# EAGLE board ssd_blinky_eagle_panel (EAGLE 6.5.0)
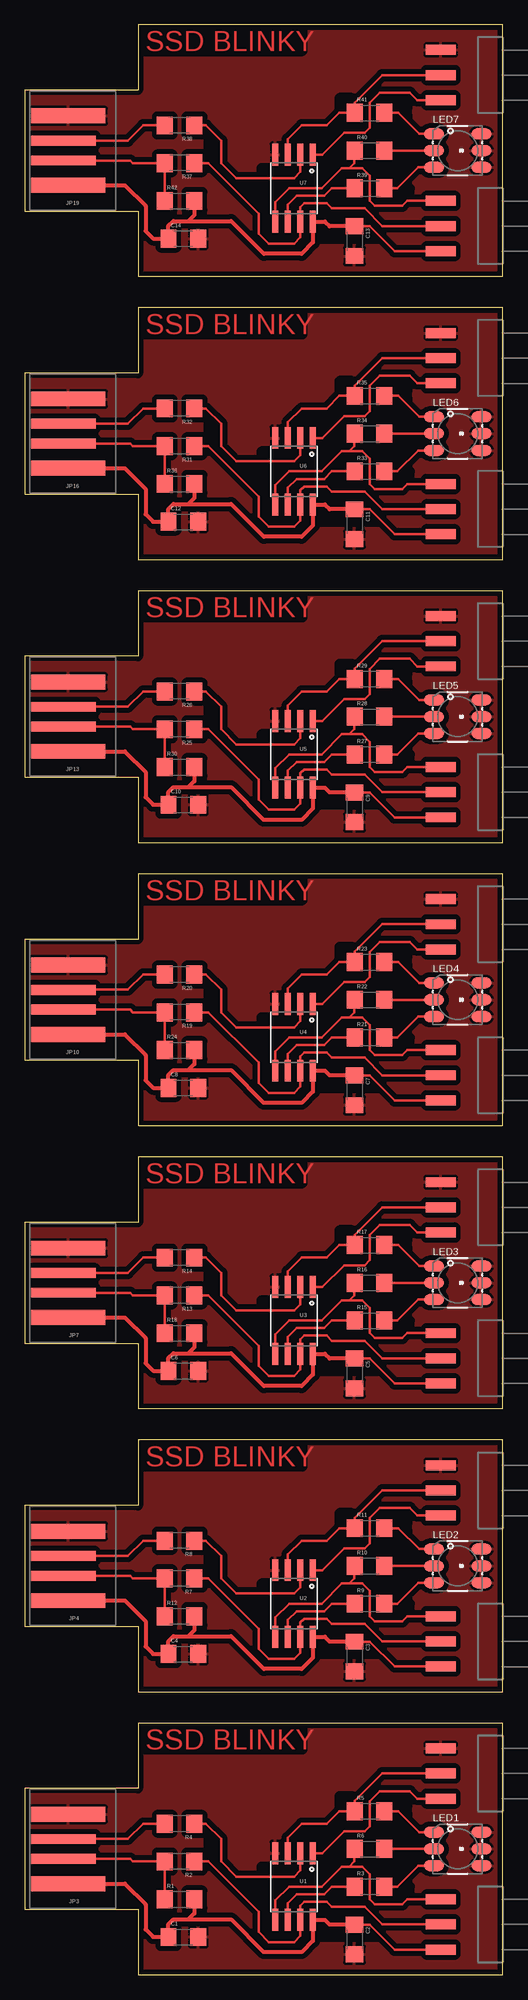
[diagram p0: board, top side]

Size 48.26 x 196.85 mm. Coordinates in mm from the lower left corner, seen from the top.
Outline: 11.43,0 48.26,0 48.26,25.4 11.43,25.4 11.43,18.8 0,18.8 0,6.6 11.43,6.6 11.43,0
Outline: 11.43,28.57 48.26,28.57 48.26,53.98 11.43,53.98 11.43,47.37 0,47.37 0,35.18 11.43,35.18 11.43,28.57
Outline: 11.43,57.15 48.26,57.15 48.26,82.55 11.43,82.55 11.43,75.95 0,75.95 0,63.75 11.43,63.75 11.43,57.15
Outline: 11.43,85.72 48.26,85.72 48.26,111.12 11.43,111.12 11.43,104.52 0,104.52 0,92.33 11.43,92.33 11.43,85.72
Outline: 11.43,114.3 48.26,114.3 48.26,139.7 11.43,139.7 11.43,133.1 0,133.1 0,120.9 11.43,120.9 11.43,114.3
Outline: 11.43,142.88 48.26,142.88 48.26,168.28 11.43,168.28 11.43,161.67 0,161.67 0,149.48 11.43,149.48 11.43,142.88
Outline: 11.43,171.45 48.26,171.45 48.26,196.85 11.43,196.85 11.43,190.25 0,190.25 0,178.05 11.43,178.05 11.43,171.45
Copper layers (1+16): Top 0.0178mm / dielectric 12mil / Bottom 0.0178mm
Design rules "GoldPhoenix-BES-2Lyr *": minimum track width 6mil, minimum drill 8mil, track to track 12mil, track to pad 12mil, pad to pad 12mil, via to via 12mil, smd to smd 12mil, copper to edge 20mil, drill to drill 16mil, minimum pad ring 8mil, minimum via ring 8mil, stop-mask expansion 3mil, vias tented up to drill 0mil, thermal gap 10mil
tRestrict: area 38.1,8.1 to 38.9,8.9; area 23.9,10.4 to 25.4,10.9; area 37.8,17 to 38.6,17.8; area 30,4.1 to 31.8,4.6; area 24.1,7.6 to 24.6,9.4; area 31.8,16.8 to 32,18; area 32,17.8 to 33,18; area 30,3.8 to 35.6,4.1; area 38.4,16.3 to 38.6,17; area 18.5,11.9 to 19,13.7; area 38.1,36.7 to 38.9,37.5; area 23.9,39 to 25.4,39.5; area 37.8,45.6 to 38.6,46.4; area 30,32.6 to 31.8,33.1; area 24.1,36.2 to 24.6,38; area 31.8,45.3 to 32,46.6; area 32,46.4 to 33,46.6; area 30,32.4 to 35.6,32.6; area 38.4,44.8 to 38.6,45.6; area 18.5,40.5 to 19,42.3; area 38.1,65.3 to 38.9,66; area 23.9,67.6 to 25.4,68.1; area 37.8,74.2 to 38.6,74.9; area 30,61.2 to 31.8,61.7; area 24.1,64.8 to 24.6,66.5; area 31.8,73.9 to 32,75.2; area 32,74.9 to 33,75.2; area 30,61 to 35.6,61.2; area 38.4,73.4 to 38.6,74.2; area 18.5,69.1 to 19,70.9; area 38.1,93.9 to 38.9,94.6; area 23.9,96.1 to 25.4,96.6; area 37.8,102.7 to 38.6,103.5; area 30,89.8 to 31.8,90.3; area 24.1,93.3 to 24.6,95.1; area 31.8,102.5 to 32,103.8; area 32,103.5 to 33,103.8; area 30,89.5 to 35.6,89.8; area 38.4,102 to 38.6,102.7; area 18.5,97.7 to 19,99.4; area 38.1,122.4 to 38.9,123.2; area 23.9,124.7 to 25.4,125.2; area 37.8,131.3 to 38.6,132.1; area 30,118.4 to 31.8,118.9; area 24.1,121.9 to 24.6,123.7; area 31.8,131.1 to 32,132.3; area 32,132.1 to 33,132.3; area 30,118.1 to 35.6,118.4; area 38.4,130.6 to 38.6,131.3; area 18.5,126.2 to 19,128; area 38.1,151 to 38.9,151.8; area 23.9,153.3 to 25.4,153.8; area 37.8,159.9 to 38.6,160.7; area 30,146.9 to 31.8,147.4; area 24.1,150.5 to 24.6,152.3; area 31.8,159.6 to 32,160.9; area 32,160.7 to 33,160.9; area 30,146.7 to 35.6,146.9; area 38.4,159.1 to 38.6,159.9; area 18.5,154.8 to 19,156.6; area 38.1,179.6 to 38.9,180.3; area 23.9,181.9 to 25.4,182.4; area 37.8,188.5 to 38.6,189.2; area 30,175.5 to 31.8,176; area 24.1,179.1 to 24.6,180.8; area 31.8,188.2 to 32,189.5; area 32,189.2 to 33,189.5; area 30,175.3 to 35.6,175.5; area 38.4,187.7 to 38.6,188.5; area 18.5,183.4 to 19.1,185.2

## Footprints (pad centres in the part's own frame; a part is rotated, then mirrored left to right if it is on the bottom)
1206 = smd 1.6 x 1.8: 1 -1.5,0; 2 1.5,0
1X03_SMD_RA_MALE = smd 1 x 3: 1 -2.54,5; 2 0,5; 3 2.54,5
USB-A-PCB = smd 7.5 x 1.5: 5V -0.2,3.5; GND -0.2,-3.5 | smd 6.5 x 1: USB_M 0.3,-1; USB_P 0.3,1
LED-TRICOLOR-5050 = smd 2 x 1.1: 1 -2.4,1.7; 2 -2.4,0; 3 -2.4,-1.7; 4 2.4,-1.7; 5 2.4,0; 6 2.4,1.7
SO08-EIAJ = smd 0.61 x 2.21: 1 -1.905,-3.378; 2 -0.635,-3.378; 3 0.635,-3.378; 4 1.905,-3.378; 5 1.905,3.353; 6 0.635,3.353; 7 -0.635,3.353; 8 -1.905,3.353

## Placement (x,y rotation side)
C1  [1206]  16,3.81 0 top
C2  [1206]  33.27,3.56 270 top
C3  [1206]  33.27,32.13 270 top
C4  [1206]  16,32.38 0 top
C5  [1206]  33.27,60.71 270 top
C6  [1206]  16,60.96 0 top
C7  [1206]  33.27,89.28 270 top
C8  [1206]  16,89.53 0 top
C9  [1206]  33.27,117.86 270 top
C10  [1206]  16,118.11 0 top
C11  [1206]  33.27,146.43 270 top
C12  [1206]  16,146.69 0 top
C13  [1206]  33.27,175.01 270 top
C14  [1206]  16,175.26 0 top
JP1  [1X03_SMD_RA_MALE]  46.99,5.08 90 top
JP2  [1X03_SMD_RA_MALE]  46.99,20.32 90 top
JP3  USBPCB  [USB-A-PCB]  4.19,12.7 180 top
JP4  USBPCB  [USB-A-PCB]  4.19,41.27 180 top
JP5  [1X03_SMD_RA_MALE]  46.99,33.66 90 top
JP6  [1X03_SMD_RA_MALE]  46.99,48.9 90 top
JP7  USBPCB  [USB-A-PCB]  4.19,69.85 180 top
JP8  [1X03_SMD_RA_MALE]  46.99,62.23 90 top
JP9  [1X03_SMD_RA_MALE]  46.99,77.47 90 top
JP10  USBPCB  [USB-A-PCB]  4.19,98.42 180 top
JP11  [1X03_SMD_RA_MALE]  46.99,90.81 90 top
JP12  [1X03_SMD_RA_MALE]  46.99,106.05 90 top
JP13  USBPCB  [USB-A-PCB]  4.19,127 180 top
JP14  [1X03_SMD_RA_MALE]  46.99,119.38 90 top
JP15  [1X03_SMD_RA_MALE]  46.99,134.62 90 top
JP16  USBPCB  [USB-A-PCB]  4.19,155.57 180 top
JP17  [1X03_SMD_RA_MALE]  46.99,147.96 90 top
JP18  [1X03_SMD_RA_MALE]  46.99,163.19 90 top
JP19  USBPCB  [USB-A-PCB]  4.19,184.15 180 top
JP20  [1X03_SMD_RA_MALE]  46.99,176.53 90 top
JP21  [1X03_SMD_RA_MALE]  46.99,191.77 90 top
LED1  LED-TRICOLOR-5050NO_IC  [LED-TRICOLOR-5050]  43.69,12.7 0 top
LED2  LED-TRICOLOR-5050NO_IC  [LED-TRICOLOR-5050]  43.69,41.27 0 top
LED3  LED-TRICOLOR-5050NO_IC  [LED-TRICOLOR-5050]  43.69,69.85 0 top
LED4  LED-TRICOLOR-5050NO_IC  [LED-TRICOLOR-5050]  43.69,98.42 0 top
LED5  LED-TRICOLOR-5050NO_IC  [LED-TRICOLOR-5050]  43.69,127 0 top
LED6  LED-TRICOLOR-5050NO_IC  [LED-TRICOLOR-5050]  43.69,155.57 0 top
LED7  LED-TRICOLOR-5050NO_IC  [LED-TRICOLOR-5050]  43.69,184.15 0 top
R1  [1206]  15.62,7.62 0 top
R2  [1206]  15.62,11.43 180 top
R3  [1206]  34.8,8.89 0 top
R4  [1206]  15.62,15.24 180 top
R5  [1206]  34.8,16.51 0 top
R6  [1206]  34.8,12.7 0 top
R7  [1206]  15.62,40.01 180 top
R8  [1206]  15.62,43.81 180 top
R9  [1206]  34.8,37.47 0 top
R10  [1206]  34.8,41.27 0 top
R11  [1206]  34.8,45.09 0 top
R12  [1206]  15.62,36.2 0 top
R13  [1206]  15.62,68.58 180 top
R14  [1206]  15.62,72.39 180 top
R15  [1206]  34.8,66.04 0 top
R16  [1206]  34.8,69.85 0 top
R17  [1206]  34.8,73.66 0 top
R18  [1206]  15.62,64.77 0 top
R19  [1206]  15.62,97.16 180 top
R20  [1206]  15.62,100.97 180 top
R21  [1206]  34.8,94.61 0 top
R22  [1206]  34.8,98.42 0 top
R23  [1206]  34.8,102.23 0 top
R24  [1206]  15.62,93.34 0 top
R25  [1206]  15.62,125.73 180 top
R26  [1206]  15.62,129.54 180 top
R27  [1206]  34.8,123.19 0 top
R28  [1206]  34.8,127 0 top
R29  [1206]  34.8,130.81 0 top
R30  [1206]  15.62,121.92 0 top
R31  [1206]  15.62,154.31 180 top
R32  [1206]  15.62,158.12 180 top
R33  [1206]  34.8,151.76 0 top
R34  [1206]  34.8,155.57 0 top
R35  [1206]  34.8,159.38 0 top
R36  [1206]  15.62,150.5 0 top
R37  [1206]  15.62,182.88 180 top
R38  [1206]  15.62,186.69 180 top
R39  [1206]  34.8,180.34 0 top
R40  [1206]  34.8,184.15 0 top
R41  [1206]  34.8,187.96 0 top
R42  [1206]  15.62,179.07 0 top
U1  Tiny85-20-SMT  [SO08-EIAJ]  27.18,8.89 180 top
U2  Tiny85-20-SMT  [SO08-EIAJ]  27.18,37.47 180 top
U3  Tiny85-20-SMT  [SO08-EIAJ]  27.18,66.04 180 top
U4  Tiny85-20-SMT  [SO08-EIAJ]  27.18,94.61 180 top
U5  Tiny85-20-SMT  [SO08-EIAJ]  27.18,123.19 180 top
U6  Tiny85-20-SMT  [SO08-EIAJ]  27.18,151.76 180 top
U7  Tiny85-20-SMT  [SO08-EIAJ]  27.18,180.34 180 top

## Library data of the parts
C1-C14 R1-R42 = SparkFun-Passives
JP1 JP2 JP5 JP6 JP8 JP9 JP11 JP12 JP14 JP15 JP17 JP18 JP20 JP21 = SparkFun-Connectors; PROD_ID: CONN-10925
JP3 JP4 JP7 JP10 JP13 JP16 JP19 = SparkFun-Connectors
LED1-LED7 = SparkFun-LED
U1-U7 = SparkFun-DigitalIC; PROD_ID: IC-09092

## Nets
+5V: C1.1 C2.1 JP1.1 JP3.5V R1.2 U1.8
+5V1: C3.1 C4.1 JP4.5V JP5.1 R12.2 U2.8
+5V2: C5.1 C6.1 JP7.5V JP8.1 R18.2 U3.8
+5V3: C7.1 C8.1 JP10.5V JP11.1 R24.2 U4.8
+5V4: C9.1 C10.1 JP13.5V JP14.1 R30.2 U5.8
+5V5: C11.1 C12.1 JP16.5V JP17.1 R36.2 U6.8
+5V6: C13.1 C14.1 JP19.5V JP20.1 R42.2 U7.8
D+: JP3.USB_P R1.1 R2.2
D+1: JP4.USB_P R7.2 R12.1
D+2: JP7.USB_P R13.2 R18.1
D+3: JP10.USB_P R19.2 R24.1
D+4: JP13.USB_P R25.2 R30.1
D+5: JP16.USB_P R31.2 R36.1
D+6: JP19.USB_P R37.2 R42.1
D-: JP3.USB_M R4.2
D-1: JP4.USB_M R8.2
D-2: JP7.USB_M R14.2
D-3: JP10.USB_M R20.2
D-4: JP13.USB_M R26.2
D-5: JP16.USB_M R32.2
D-6: JP19.USB_M R38.2
GND: C1.2 C2.2 JP2.3 JP3.GND LED1.4 LED1.5 LED1.6 U1.4
GND1: C3.2 C4.2 JP4.GND JP6.3 LED2.4 LED2.5 LED2.6 U2.4
GND2: C5.2 C6.2 JP7.GND JP9.3 LED3.4 LED3.5 LED3.6 U3.4
GND3: C7.2 C8.2 JP10.GND JP12.3 LED4.4 LED4.5 LED4.6 U4.4
GND4: C9.2 C10.2 JP13.GND JP15.3 LED5.4 LED5.5 LED5.6 U5.4
GND5: C11.2 C12.2 JP16.GND JP18.3 LED6.4 LED6.5 LED6.6 U6.4
GND6: C13.2 C14.2 JP19.GND JP21.3 LED7.4 LED7.5 LED7.6 U7.4
MISO: JP2.2 R5.1 U1.3
MISO1: JP6.2 R11.1 U2.3
MISO2: JP9.2 R17.1 U3.3
MISO3: JP12.2 R23.1 U4.3
MISO4: JP15.2 R29.1 U5.3
MISO5: JP18.2 R35.1 U6.3
MISO6: JP21.2 R41.1 U7.3
MOSI: JP1.3 R6.1 U1.5
MOSI1: JP5.3 R10.1 U2.5
MOSI2: JP8.3 R16.1 U3.5
MOSI3: JP11.3 R22.1 U4.5
MOSI4: JP14.3 R28.1 U5.5
MOSI5: JP17.3 R34.1 U6.5
MOSI6: JP20.3 R40.1 U7.5
N$1: R4.1 U1.2
N$2: R3.1 U1.6
N$3: LED2.2 R10.2
N$4: LED1.2 R6.2
N$5: LED1.1 R5.2
N$6: LED1.3 R3.2
N$7: LED2.1 R11.2
N$8: LED2.3 R9.2
N$9: R8.1 U2.2
N$10: R9.1 U2.6
N$11: LED3.2 R16.2
N$12: LED3.1 R17.2
N$13: LED3.3 R15.2
N$14: R14.1 U3.2
N$15: R15.1 U3.6
N$16: LED4.2 R22.2
N$17: LED4.1 R23.2
N$18: LED4.3 R21.2
N$19: R20.1 U4.2
N$20: R21.1 U4.6
N$21: LED5.2 R28.2
N$22: LED5.1 R29.2
N$23: LED5.3 R27.2
N$24: R26.1 U5.2
N$25: R27.1 U5.6
N$26: LED6.2 R34.2
N$27: LED6.1 R35.2
N$28: LED6.3 R33.2
N$29: R32.1 U6.2
N$30: R33.1 U6.6
N$31: LED7.2 R40.2
N$32: LED7.1 R41.2
N$33: LED7.3 R39.2
N$34: R38.1 U7.2
N$35: R39.1 U7.6
RST: JP2.1 U1.1
RST1: JP6.1 U2.1
RST2: JP9.1 U3.1
RST3: JP12.1 U4.1
RST4: JP15.1 U5.1
RST5: JP18.1 U6.1
RST6: JP21.1 U7.1
SCK: JP1.2 R2.1 U1.7
SCK1: JP5.2 R7.1 U2.7
SCK2: JP8.2 R13.1 U3.7
SCK3: JP11.2 R19.1 U4.7
SCK4: JP14.2 R25.1 U5.7
SCK5: JP17.2 R31.1 U6.7
SCK6: JP20.2 R37.1 U7.7

## Tracks (layer width: path | path; a pad name or v marks a point on that pad's centre or on a via)
+5V
  Top 0.254: 17.14,7.62 17.14,7.6 R1.2 | JP1.1 37.34,2.54 34.82,5.06 C2.1
  Top 0.381: JP3.5V 10.1,9.2 12.19,7.11 12.19,4.57 12.95,3.81 C1.1 14.5,5.1 14.99,5.59 16.51,5.59 | C2.1 30.76,5.06 30.28,5.54 U1.8 29.08,3.43 27.94,2.29 24.13,2.29 20.83,5.59 16.51,5.59 | R1.2 17.12,6.2 16.51,5.59
+5V1
  Top 0.254: 17.14,36.2 17.14,36.17 R12.2 | JP5.1 37.34,31.11 34.82,33.63 C3.1
  Top 0.381: JP4.5V 10.1,37.77 12.19,35.69 12.19,33.15 12.95,32.38 C4.1 14.5,33.68 14.99,34.16 16.51,34.16 | C3.1 30.76,33.63 30.28,34.11 U2.8 29.08,32 27.94,30.86 24.13,30.86 20.83,34.16 16.51,34.16 | R12.2 17.12,34.77 16.51,34.16
+5V2
  Top 0.254: 17.14,64.77 17.14,64.75 R18.2 | JP8.1 37.34,59.69 34.82,62.21 C5.1
  Top 0.381: JP7.5V 10.1,66.35 12.19,64.26 12.19,61.72 12.95,60.96 C6.1 14.5,62.25 14.99,62.74 16.51,62.74 | C5.1 30.76,62.21 30.28,62.69 U3.8 29.08,60.58 27.94,59.44 24.13,59.44 20.83,62.74 16.51,62.74 | R18.2 17.12,63.35 16.51,62.74
+5V3
  Top 0.254: 17.14,93.34 17.14,93.32 R24.2 | JP11.1 37.34,88.27 34.82,90.78 C7.1
  Top 0.381: JP10.5V 10.1,94.92 12.19,92.84 12.19,90.3 12.95,89.53 C8.1 14.5,90.83 14.99,91.31 16.51,91.31 | C7.1 30.76,90.78 30.28,91.26 U4.8 29.08,89.15 27.94,88.01 24.13,88.01 20.83,91.31 16.51,91.31 | R24.2 17.12,91.92 16.51,91.31
+5V4
  Top 0.254: 17.14,121.92 17.14,121.9 R30.2 | JP14.1 37.34,116.84 34.82,119.36 C9.1
  Top 0.381: JP13.5V 10.1,123.5 12.19,121.41 12.19,118.87 12.95,118.11 C10.1 14.5,119.4 14.99,119.89 16.51,119.89 | C9.1 30.76,119.36 30.28,119.84 U5.8 29.08,117.73 27.94,116.59 24.13,116.59 20.83,119.89 16.51,119.89 | R30.2 17.12,120.5 16.51,119.89
+5V5
  Top 0.254: 17.14,150.5 17.14,150.47 R36.2 | JP17.1 37.34,145.41 34.82,147.93 C11.1
  Top 0.381: JP16.5V 10.1,152.07 12.19,149.99 12.19,147.45 12.95,146.69 C12.1 14.5,147.98 14.99,148.46 16.51,148.46 | C11.1 30.76,147.93 30.28,148.41 U6.8 29.08,146.3 27.94,145.16 24.13,145.16 20.83,148.46 16.51,148.46 | R36.2 17.12,149.07 16.51,148.46
+5V6
  Top 0.254: 17.14,179.07 17.14,179.05 R42.2 | JP20.1 37.34,173.99 34.82,176.51 C13.1
  Top 0.381: JP19.5V 10.1,180.65 12.19,178.56 12.19,176.02 12.95,175.26 C14.1 14.5,176.55 14.99,177.04 16.51,177.04 | C13.1 30.76,176.51 30.28,176.99 U7.8 29.08,174.88 27.94,173.74 24.13,173.74 20.83,177.04 16.51,177.04 | R42.2 17.12,177.65 16.51,177.04
D+
  Top 0.254: JP3.USB_P 10.65,11.7 10.92,11.43 R2.2 R1.1
D+1
  Top 0.254: JP4.USB_P 10.65,40.27 10.92,40.01 R7.2 R12.1
D+2
  Top 0.254: JP7.USB_P 10.65,68.85 10.92,68.58 R13.2 R18.1
D+3
  Top 0.254: JP10.USB_P 10.65,97.42 10.92,97.16 R19.2 R24.1
D+4
  Top 0.254: JP13.USB_P 10.65,126 10.92,125.73 R25.2 R30.1
D+5
  Top 0.254: JP16.USB_P 10.65,154.57 10.92,154.31 R31.2 R36.1
D+6
  Top 0.254: JP19.USB_P 10.65,183.15 10.92,182.88 R37.2 R42.1
D-
  Top 0.254: R4.2 11.94,15.24 10.41,13.72 3.91,13.72 JP3.USB_M
D-1
  Top 0.254: R8.2 11.94,43.81 10.41,42.29 3.91,42.29 JP4.USB_M
D-2
  Top 0.254: R14.2 11.94,72.39 10.41,70.87 3.91,70.87 JP7.USB_M
D-3
  Top 0.254: R20.2 11.94,100.97 10.41,99.44 3.91,99.44 JP10.USB_M
D-4
  Top 0.254: R26.2 11.94,129.54 10.41,128.02 3.91,128.02 JP13.USB_M
D-5
  Top 0.254: R32.2 11.94,158.12 10.41,156.59 3.91,156.59 JP16.USB_M
D-6
  Top 0.254: R38.2 11.94,186.69 10.41,185.17 3.91,185.17 JP19.USB_M
GND
  pour Top (isolate 0.508, rank 6): 0.64,24.77 47.62,24.77 47.62,0.64 0.64,0.64
GND1
  pour Top (isolate 0.508, rank 6): 0.64,53.34 47.62,53.34 47.62,29.21 0.64,29.21
GND2
  pour Top (isolate 0.508, rank 6): 0.64,81.92 47.62,81.92 47.62,57.78 0.64,57.78
GND3
  pour Top (isolate 0.508, rank 6): 0.64,110.49 47.62,110.49 47.62,86.36 0.64,86.36
GND4
  pour Top (isolate 0.508, rank 6): 0.64,139.06 47.62,139.06 47.62,114.94 0.64,114.94
GND5
  pour Top (isolate 0.508, rank 6): 0.64,167.64 47.62,167.64 47.62,143.51 0.64,143.51
GND6
  pour Top (isolate 0.508, rank 6): 0.64,196.22 47.62,196.22 47.62,172.09 0.64,172.09
MISO
  Top 0.254: JP2.2 36.07,20.32 33.3,17.55 R5.1 31.75,16.51 30.48,15.24 27.94,15.24 26.54,13.84 U1.3
MISO1
  Top 0.254: JP6.2 36.07,48.9 33.3,46.12 R11.1 31.75,45.09 30.48,43.81 27.94,43.81 26.54,42.42 U2.3
MISO2
  Top 0.254: JP9.2 36.07,77.47 33.3,74.7 R17.1 31.75,73.66 30.48,72.39 27.94,72.39 26.54,70.99 U3.3
MISO3
  Top 0.254: JP12.2 36.07,106.05 33.3,103.28 R23.1 31.75,102.23 30.48,100.97 27.94,100.97 26.54,99.57 U4.3
MISO4
  Top 0.254: JP15.2 36.07,134.62 33.3,131.85 R29.1 31.75,130.81 30.48,129.54 27.94,129.54 26.54,128.14 U5.3
MISO5
  Top 0.254: JP18.2 36.07,163.19 33.3,160.43 R35.1 31.75,159.38 30.48,158.12 27.94,158.12 26.54,156.72 U6.3
MISO6
  Top 0.254: JP21.2 36.07,191.77 33.3,189 R41.1 31.75,187.96 30.48,186.69 27.94,186.69 26.54,185.29 U7.3
MOSI
  Top 0.254: U1.5 25.27,7.49 26.67,8.89 29.97,8.89 32,10.92 32.77,10.92 | JP1.3 38.61,7.62 38.1,7.11 35.31,7.11 34.8,7.62 34.8,10.16 34.04,10.92 32.77,10.92 | 32.77,10.92 33.27,11.43 33.27,12.68 R6.1
MOSI1
  Top 0.254: U2.5 25.27,36.07 26.67,37.47 29.97,37.47 32,39.5 32.77,39.5 | JP5.3 38.61,36.2 38.1,35.69 35.31,35.69 34.8,36.2 34.8,38.73 34.04,39.5 32.77,39.5 | 32.77,39.5 33.27,40.01 33.27,41.25 R10.1
MOSI2
  Top 0.254: U3.5 25.27,64.64 26.67,66.04 29.97,66.04 32,68.07 32.77,68.07 | JP8.3 38.61,64.77 38.1,64.26 35.31,64.26 34.8,64.77 34.8,67.31 34.04,68.07 32.77,68.07 | 32.77,68.07 33.27,68.58 33.27,69.83 R16.1
MOSI3
  Top 0.254: U4.5 25.27,93.22 26.67,94.61 29.97,94.61 32,96.65 32.77,96.65 | JP11.3 38.61,93.34 38.1,92.84 35.31,92.84 34.8,93.34 34.8,95.89 34.04,96.65 32.77,96.65 | 32.77,96.65 33.27,97.16 33.27,98.4 R22.1
MOSI4
  Top 0.254: U5.5 25.27,121.79 26.67,123.19 29.97,123.19 32,125.22 32.77,125.22 | JP14.3 38.61,121.92 38.1,121.41 35.31,121.41 34.8,121.92 34.8,124.46 34.04,125.22 32.77,125.22 | 32.77,125.22 33.27,125.73 33.27,126.98 R28.1
MOSI5
  Top 0.254: U6.5 25.27,150.37 26.67,151.76 29.97,151.76 32,153.8 32.77,153.8 | JP17.3 38.61,150.5 38.1,149.99 35.31,149.99 34.8,150.5 34.8,153.03 34.04,153.8 32.77,153.8 | 32.77,153.8 33.27,154.31 33.27,155.55 R34.1
MOSI6
  Top 0.254: U7.5 25.27,178.94 26.67,180.34 29.97,180.34 32,182.37 32.77,182.37 | JP20.3 38.61,179.07 38.1,178.56 35.31,178.56 34.8,179.07 34.8,181.61 34.04,182.37 32.77,182.37 | 32.77,182.37 33.27,182.88 33.27,184.13 R40.1
N$1
  Top 0.254: U1.2 27.81,10.54 27.18,9.91 21.34,9.91 19.81,11.43 19.81,13.72 18.29,15.24 R4.1
N$2
  Top 0.254: U1.6 26.54,7.24 27.43,8.13 30.23,8.13 30.99,8.89 R3.1
N$3
  Top 0.254: LED2.2 R10.2
N$4
  Top 0.254: LED1.2 R6.2
N$5
  Top 0.254: LED1.1 39.8,14.4 37.69,16.51 R5.2
N$6
  Top 0.254: LED1.3 39.7,11 37.59,8.89 R3.2
N$7
  Top 0.254: LED2.1 39.8,42.98 37.69,45.09 R11.2
N$8
  Top 0.254: LED2.3 39.7,39.58 37.59,37.47 R9.2
N$9
  Top 0.254: U2.2 27.81,39.12 27.18,38.48 21.34,38.48 19.81,40.01 19.81,42.29 18.29,43.81 R8.1
N$10
  Top 0.254: U2.6 26.54,35.81 27.43,36.7 30.23,36.7 30.99,37.47 R9.1
N$11
  Top 0.254: LED3.2 R16.2
N$12
  Top 0.254: LED3.1 39.8,71.55 37.69,73.66 R17.2
N$13
  Top 0.254: LED3.3 39.7,68.15 37.59,66.04 R15.2
N$14
  Top 0.254: U3.2 27.81,67.69 27.18,67.06 21.34,67.06 19.81,68.58 19.81,70.87 18.29,72.39 R14.1
N$15
  Top 0.254: U3.6 26.54,64.39 27.43,65.28 30.23,65.28 30.99,66.04 R15.1
N$16
  Top 0.254: LED4.2 R22.2
N$17
  Top 0.254: LED4.1 39.8,100.12 37.69,102.23 R23.2
N$18
  Top 0.254: LED4.3 39.7,96.72 37.59,94.61 R21.2
N$19
  Top 0.254: U4.2 27.81,96.27 27.18,95.63 21.34,95.63 19.81,97.16 19.81,99.44 18.29,100.97 R20.1
N$20
  Top 0.254: U4.6 26.54,92.96 27.43,93.85 30.23,93.85 30.99,94.61 R21.1
N$21
  Top 0.254: LED5.2 R28.2
N$22
  Top 0.254: LED5.1 39.8,128.7 37.69,130.81 R29.2
N$23
  Top 0.254: LED5.3 39.7,125.3 37.59,123.19 R27.2
N$24
  Top 0.254: U5.2 27.81,124.84 27.18,124.21 21.34,124.21 19.81,125.73 19.81,128.02 18.29,129.54 R26.1
N$25
  Top 0.254: U5.6 26.54,121.54 27.43,122.43 30.23,122.43 30.99,123.19 R27.1
N$26
  Top 0.254: LED6.2 R34.2
N$27
  Top 0.254: LED6.1 39.8,157.28 37.69,159.38 R35.2
N$28
  Top 0.254: LED6.3 39.7,153.88 37.59,151.76 R33.2
N$29
  Top 0.254: U6.2 27.81,153.42 27.18,152.78 21.34,152.78 19.81,154.31 19.81,156.59 18.29,158.12 R32.1
N$30
  Top 0.254: U6.6 26.54,150.11 27.43,151 30.23,151 30.99,151.76 R33.1
N$31
  Top 0.254: LED7.2 R40.2
N$32
  Top 0.254: LED7.1 39.8,185.85 37.69,187.96 R41.2
N$33
  Top 0.254: LED7.3 39.7,182.45 37.59,180.34 R39.2
N$34
  Top 0.254: U7.2 27.81,181.99 27.18,181.36 21.34,181.36 19.81,182.88 19.81,185.17 18.29,186.69 R38.1
N$35
  Top 0.254: U7.6 26.54,178.69 27.43,179.58 30.23,179.58 30.99,180.34 R39.1
RST
  Top 0.254: 42.93,17.78 JP2.1 39.62,17.78 38.86,18.54 35.81,18.54 34.8,17.53 34.8,14.99 34.29,14.48 32.26,14.48 30.05,12.27 U1.1
RST1
  Top 0.254: 42.93,46.35 JP6.1 39.62,46.35 38.86,47.12 35.81,47.12 34.8,46.1 34.8,43.56 34.29,43.05 32.26,43.05 30.05,40.84 U2.1
RST2
  Top 0.254: 42.93,74.93 JP9.1 39.62,74.93 38.86,75.69 35.81,75.69 34.8,74.68 34.8,72.14 34.29,71.63 32.26,71.63 30.05,69.42 U3.1
RST3
  Top 0.254: 42.93,103.5 JP12.1 39.62,103.5 38.86,104.27 35.81,104.27 34.8,103.25 34.8,100.71 34.29,100.2 32.26,100.2 30.05,97.99 U4.1
RST4
  Top 0.254: 42.93,132.08 JP15.1 39.62,132.08 38.86,132.84 35.81,132.84 34.8,131.83 34.8,129.29 34.29,128.78 32.26,128.78 30.05,126.57 U5.1
RST5
  Top 0.254: 42.93,160.66 JP18.1 39.62,160.66 38.86,161.42 35.81,161.42 34.8,160.4 34.8,157.86 34.29,157.35 32.26,157.35 30.05,155.14 U6.1
RST6
  Top 0.254: 42.93,189.23 JP21.1 39.62,189.23 38.86,189.99 35.81,189.99 34.8,188.98 34.8,186.44 34.29,185.93 32.26,185.93 30.05,183.72 U7.1
SCK
  Top 0.254: R2.1 18.54,11.43 23.62,6.35 23.62,4.32 24.64,3.3 27.18,3.3 27.81,3.94 U1.7 27.81,6.99 28.19,7.37 30.48,7.37 30.99,6.86 34.29,6.86 36.07,5.08 JP1.2
SCK1
  Top 0.254: R7.1 18.54,40.01 23.62,34.92 23.62,32.89 24.64,31.88 27.18,31.88 27.81,32.51 U2.7 27.81,35.56 28.19,35.94 30.48,35.94 30.99,35.43 34.29,35.43 36.07,33.66 JP5.2
SCK2
  Top 0.254: R13.1 18.54,68.58 23.62,63.5 23.62,61.47 24.64,60.45 27.18,60.45 27.81,61.09 U3.7 27.81,64.14 28.19,64.52 30.48,64.52 30.99,64.01 34.29,64.01 36.07,62.23 JP8.2
SCK3
  Top 0.254: R19.1 18.54,97.16 23.62,92.08 23.62,90.04 24.64,89.03 27.18,89.03 27.81,89.66 U4.7 27.81,92.71 28.19,93.09 30.48,93.09 30.99,92.58 34.29,92.58 36.07,90.81 JP11.2
SCK4
  Top 0.254: R25.1 18.54,125.73 23.62,120.65 23.62,118.62 24.64,117.6 27.18,117.6 27.81,118.24 U5.7 27.81,121.28 28.19,121.67 30.48,121.67 30.99,121.16 34.29,121.16 36.07,119.38 JP14.2
SCK5
  Top 0.254: R31.1 18.54,154.31 23.62,149.22 23.62,147.19 24.64,146.18 27.18,146.18 27.81,146.81 U6.7 27.81,149.86 28.19,150.24 30.48,150.24 30.99,149.73 34.29,149.73 36.07,147.96 JP17.2
SCK6
  Top 0.254: R37.1 18.54,182.88 23.62,177.8 23.62,175.77 24.64,174.75 27.18,174.75 27.81,175.39 U7.7 27.81,178.44 28.19,178.82 30.48,178.82 30.99,178.31 34.29,178.31 36.07,176.53 JP20.2

## Text on the board
Top: SSD BLINKY | SSD BLINKY | SSD BLINKY | SSD BLINKY | SSD BLINKY | SSD BLINKY | SSD BLINKY